# Altium PCB Arm_control_pull.PcbDoc
Units mil, origin at the board's own origin, x right, y up, seen from the top; angles counter-clockwise.
Board outline 14560 x 6790 mil, 2 copper layers (Top Layer, Bottom Layer), stack 61.8 mil thick; 46 components, 53 nets, 373 pads, 23 vias.
Unrouted connection lines stored in the file: 8.
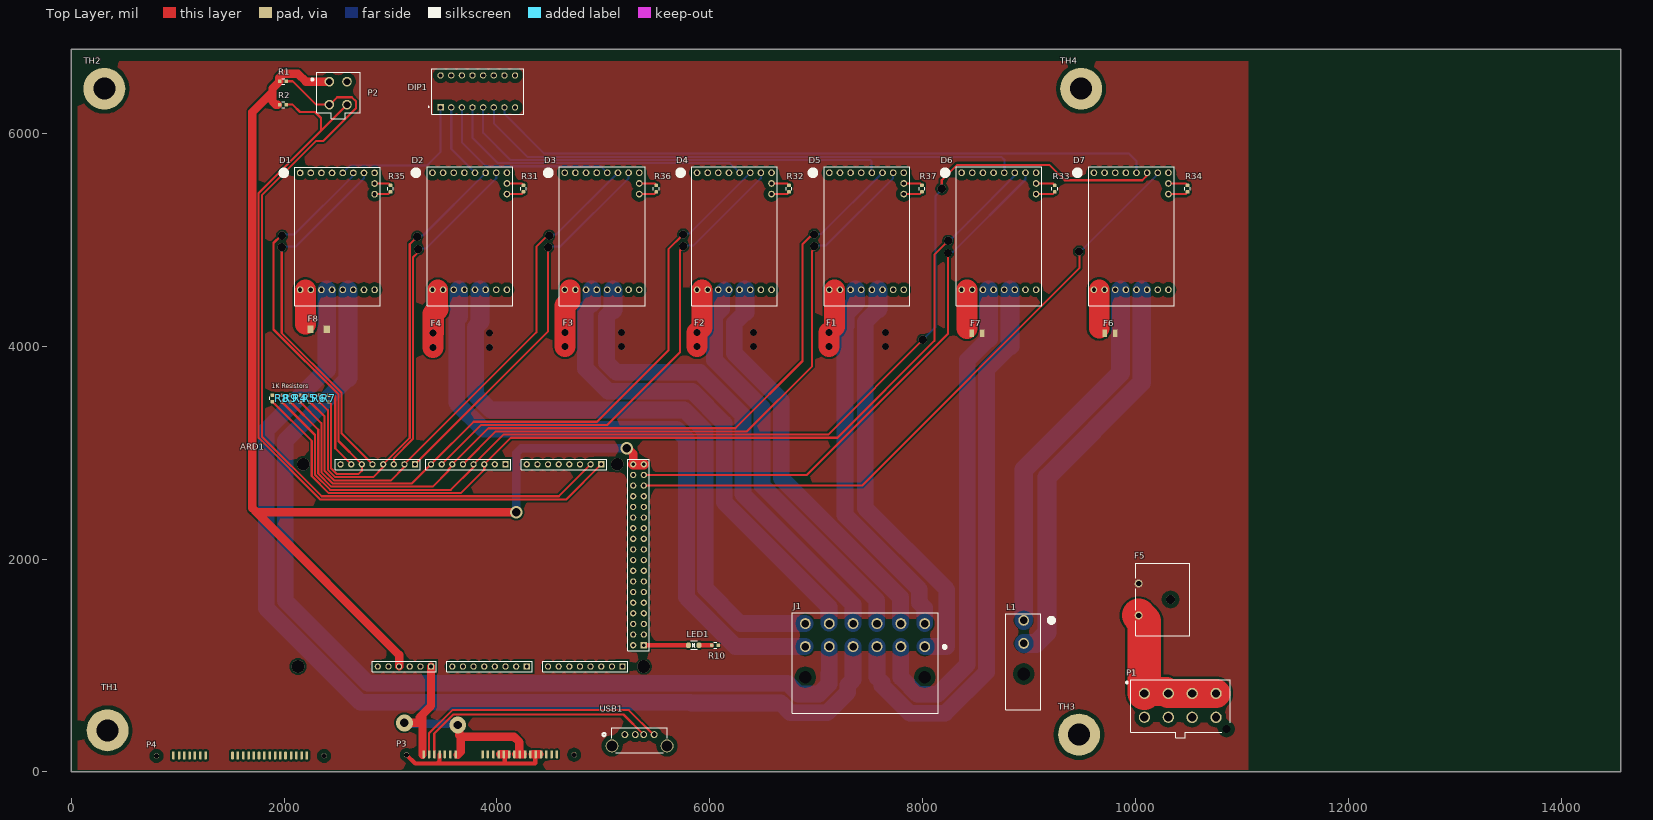
[diagram p0: Top Layer view]
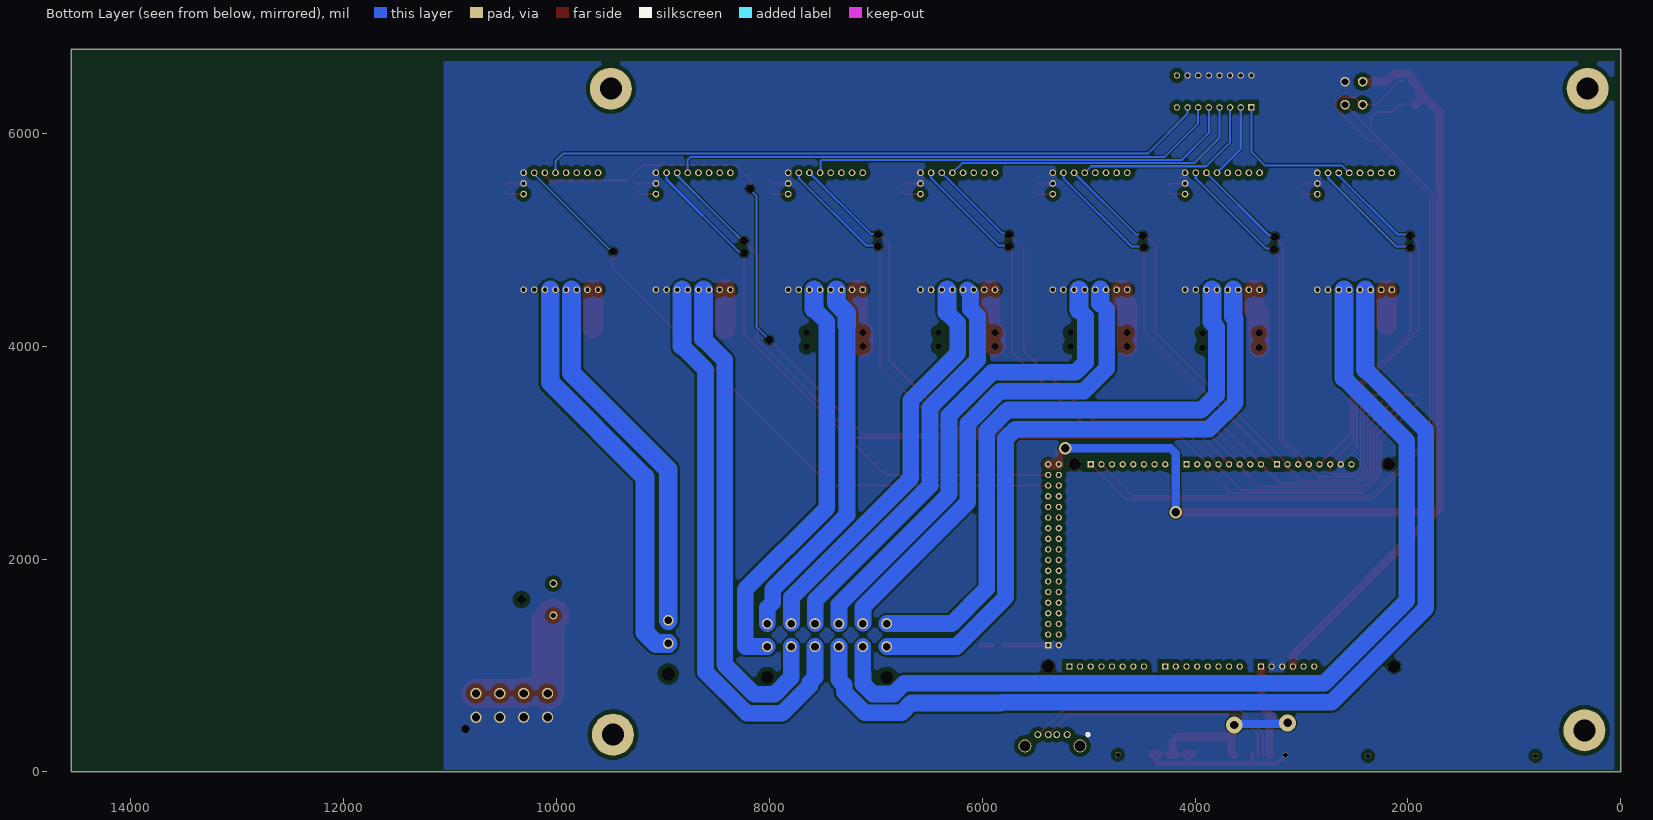
[diagram p1: Bottom Layer view, seen from below]

## Layer stack, top to bottom
Top Solder: solder mask 0.4, Solder Resist, Dk 3.5
Top Layer: signal copper 1.4
Dielectric 1: core 59, Core-043, Dk 4.3
Bottom Layer: signal copper 1.4
Bottom Solder: solder mask 0.4, Solder Resist, Dk 3.5

## Board outline
0,0 0,6790 14560,6790 14560,0

## Design rules (kind name [scope] priority, off if disabled: settings)
BoardOutlineClearance [All] p1: gap=10 ignorepadtopadclearanceinfootprint=FALSE except(0: Arc-SplitContinuation Track-SplitContinuation SMDPad-SplitContinuation THPad-SplitContinuation Via-SplitContinuation Fill-SplitContinuation Poly-SplitContinuation Region-SplitContinuation Text-SplitContinuation; 5: Track-OutlineEdge SMDPad-OutlineEdge THPad-OutlineEdge Via-OutlineEdge Fill-OutlineEdge Poly-OutlineEdge Region-OutlineEdge Text-OutlineEdge)
Clearance 14.8VP_CLearance [InNet('14.8V') or InNet('OutA1') or  InNet('OutA2') or InNet('OutA3') or InNet('OutA4') or InNet('OutA5') or InNet('OutA6') or InNet('OutA7') or InNet('OutB1') or  InNet('OutB2') or InNet('OutB3') or InNet('OutB4') or InNet('OutB5') or InNet('OutB6') or InNet('OutB7')] p1: gap=20 ignorepadtopadclearanceinfootprint=TRUE except(0: Arc-Hole Track-Hole SMDPad-Hole THPad-Hole Via-Hole Fill-Hole Poly-Hole Region-Hole Text-Hole; 40: THPad-Poly)
Clearance [All] p2: gap=10 ignorepadtopadclearanceinfootprint=FALSE except(0: Arc-Hole Track-Hole SMDPad-Hole THPad-Hole Via-Hole Fill-Hole Poly-Hole Region-Hole Text-Hole; 40: THPad-Poly)
HoleSize [All] p1: absolutevalues=TRUE maxlimit=1000 minlimit=1 maxpercent=80.000 minpercent=20.000
PolygonConnect Direct_Connect [InComponent('P1')] p1: connectstyle=Direct reliefconductorwidth=10 reliefentries=4 polygonreliefangle="90 Angle" airgapwidth=10
PolygonConnect Thick_Connect [InComponent('D1') or  InComponent('D2') or InComponent('D3') or InComponent('D4') or InComponent('D5') or InComponent('D6') or InComponent('D7') or InComponent('VR1')] p2: connectstyle=Relief reliefconductorwidth=25 reliefentries=4 polygonreliefangle="90 Angle" airgapwidth=19.68
PolygonConnect [All] p3: thpad.connectstyle=Relief thpad.reliefconductorwidth=10 thpad.reliefentries=4 thpad.polygonreliefangle="90 Angle" thpad.airgapwidth=10 smdpad.connectstyle=Relief smdpad.reliefconductorwidth=10 smdpad.reliefentries=4 smdpad.polygonreliefangle="90 Angle" smdpad.airgapwidth=10 via.connectstyle=Direct via.reliefconductorwidth=10 via.reliefentries=4 via.polygonreliefangle="90 Angle" via.airgapwidth=10
RoomDefinition ARD [InComponentClass('ARD')] p1: confinementstyle=ConfineIn formatcopy=TRUE lockcomponents=FALSE outline 11060,20 60,20 60,6680 11060,6680
RoomDefinition Arm_control_pull [InComponentClass('Arm_control_pull')] p2: confinementstyle=ConfineIn formatcopy=TRUE lockcomponents=FALSE outline 60,20 11060,20 11060,6680 60,6680
RoutingVias [All] p1: holewidth=78.74 width=157.48 viastyle="Through Hole" minholewidth=39.37 minwidth=78.74 maxholewidth=78.74 maxwidth=157.48
SilkToSolderMaskClearance [IsPad] p1: minsilkscreentomaskgap=1 clearancetoexposedcopper=TRUE
SolderMaskExpansion [All] p1: expansion=4 istentingtop=FALSE
Width [All] p1: maxlimit=393.7 minlimit=10 preferedwidth=118.11 minimp=50.000000 maximp=50.000000 favimp=50.000000
28 further rules are at their usual default settings.

## Classes and differential pairs
component class Arm_control_pull: D1 D2 D3 D4 D5 D6 D7 DIP1 F1 F2 F3 F4 F5 F6 F7 F8 J1 L1 LED1 M1 M2 M3 M4 M5 M6 M7 P1 R10 R31 R32 R33 R34 R35 R36 R37
component class ARD: "1K Resistors" ARD1 K? P2 P3 P4 R1 R2 R4 R5 R6 R7 R8 R9 TH1 TH2 TH3 TH4 USB1

## Components (designator, comment, footprint, x,y, rotation, side; value= is the part's Value field where it differs from the comment)
"1K Resistors" "Res1" RESC1608X06N_0603 1890,3510 r270 top value=1K (schematic designator R3)
ARD1 "Arduino Mega" "Arduino Mega" 3680,1990 r0 top
D1 "Pololu G2 High-Power Motor Driver 18v25" "POLOLU 18V25" 2150,5629.21 r0 top
D2 "Pololu G2 High-Power Motor Driver 18v25" "POLOLU 18V25" 3393.33,5630 r0 top
D3 "Pololu G2 High-Power Motor Driver 18v25" "POLOLU 18V25" 4636.67,5630 r0 top
D4 "Pololu G2 High-Power Motor Driver 18v25" "POLOLU 18V25" 5880,5630 r0 top
D5 "Pololu G2 High-Power Motor Driver 18v25" "POLOLU 18V25" 7123.33,5630 r0 top
D6 "Pololu G2 High-Power Motor Driver 18v25" "POLOLU 18V25" 8366.67,5630 r0 top
D7 "Pololu G2 High-Power Motor Driver 18v25" "POLOLU 18V25" 9610,5630 r0 top
DIP1 "DIP Switch" "DIP Switch" 3820,6400 r0 top
F1 "FUSEHOLDER" "FUSEHOLDER 3557-20" 7120,4130 r0 top
F2 "FUSEHOLDER" "FUSEHOLDER 3557-20" 5880,4130 r0 top
F3 "FUSEHOLDER" "FUSEHOLDER 3557-20" 4640,4130 r0 top
F4 "FUSEHOLDER" "FUSEHOLDER 3557-20" 3400,4123.86 r0 top
F5 "MINI BLADE FUSE HOLDER" "MINI FUSE HOLDER" 10330,1620 r90 top
F6 "7 A FUSE" "7 A FUSE  0407007.WR" 9711.57,4120 r0 top
F7 "7 A FUSE" "7 A FUSE  0407007.WR" 8560,4120 r180 top
F8 "3 A FUSE" "3A FUSE ERB-RG3R00V" 2246.46,4160 r0 top
J1 "172064-1012" 172064-1012 6897.95,1393.94 r0 top
L1 "0768250002" "MOLEX 0768250002" 8950,1423.94 r0 top
LED1 "Blue LED" LTST-C171TBKT 5898.43,1190 r180 top
P1 "Mini-Fit Jr 8 Pos RA" "MOLEX 172065-0208" 10470,570 r180 top
P2 "Mini-Fit Jr 4 Pos" "MOLEX 0039281043" 2424.65,6486.54 r0 top
P3 "SATA 1" "Amphenol 10101788-002CLF" 3937.4,121.42 r180 top
P4 "SATA 2" "Amphenol 10101788-002CLF" 1587.4,111.42 r180 top
R1 "Res1" RESC1608X06N_0603 1990,6490 r180 top value=4.7K
R2 "Res1" RESC1608X06N_0603 1990,6270 r180 top value=4.7K
R4 "Res1" RESC1608X06N_0603 2150,3510 r270 top value=1K
R5 "Res1" RESC1608X06N_0603 2240,3510 r270 top value=1K
R6 "Res1" RESC1608X06N_0603 2330,3510 r270 top value=1K
R7 "Res1" RESC1608X06N_0603 2420,3510 r270 top value=1K
R8 "Res1" RESC1608X06N_0603 1980,3509.49 r270 top value=1K
R9 "Res1" RESC1608X06N_0603 2060,3510 r270 top value=1K
R10 "Res1" RESC1608X06N_0603 6050,1190 r180 top value=2.7k
R31 "Res1" RESC1608X06N_0603 4248.33,5480.51 r270 top value=50K
R32 "Res1" RESC1608X06N_0603 6745,5480.51 r270 top value=50K
R33 "Res1" RESC1608X06N_0603 9241.67,5480.51 r270 top value=50K
R34 "Res1" RESC1608X06N_0603 10490,5480.51 r270 top value=50K
R35 "Res1" RESC1608X06N_0603 3000,5480.51 r270 top value=50K
R36 "Res1" RESC1608X06N_0603 5496.67,5480.51 r270 top value=50K
R37 "Res1" RESC1608X06N_0603 7993.33,5480.51 r270 top value=50K
TH1 "M5-Screw-Hole" M5_Screw_Hole 340,390 r0 top
TH2 "M5-Screw-Hole" M5_Screw_Hole 310,6420 r0 top
TH3 "M5-Screw-Hole" M5_Screw_Hole 9470,350 r0 top
TH4 "M5-Screw-Hole" M5_Screw_Hole 9490,6420 r0 top
USB1 "UE27AE54100" UE27AE54100_AMP 5201.57,350 r0 top

## Footprints (in the part's own frame and the unit in brackets; to place one, negate y for a bottom-side part, rotate by r counter-clockwise, add the part's x,y. Pads: shape width x height; smd on the part's side, far side on the other; paste and mask are expansions set on the pad)
"3A FUSE ERB-RG3R00V" [mm] "SMT 3A 32V FAST BLOW"
  rect 1.5x1.8 smd: 1(0,0) 2(3.9,0)
"7 A FUSE  0407007.WR" [mm] "SMT 8A 24V I2C TIME LAG"
  rect 1x1.8 smd: 1(0,0) 1(2.5,0)
172064-1012 [mm] "Connector Header Through Hole, Right Angle 12 position 0.224\" (5.70mm)"
  round 2.6 hole 1.8: 1(28.5,-5.5) 2(22.8,-5.5) 3(17.1,-5.5) 4(11.4,-5.5) 5(5.7,-5.5) 6(0,-5.5) 7(28.5,0) 8(22.8,0) 9(17.1,0) 10(11.4,0) 11(5.7,0) 12(0,0)
  round 2.6 hole 3 unplated: M1(0,-12.8) M1(28.5,-12.8)
  silkscreen extent -3.11,-21.39 33.53,2.54, body extent -3.11,-21.39 31.75,0.57, height 14.55
"Amphenol 10101788-002CLF" [mm] "MALE R/A SATA SMT"
  rrect50% 0.6x1.9 smd: 1(-15.875,-1.1) 2(-14.63,-1.1) 3(-13.385,-1.1) 4(-12.14,-1.1) 5(-10.795,-1.1) 6(-9.55,-1.1) 7(-8.305,-1.1) 8(-7.06,-1.1) 9(-5.715,-1.1) 10(-4.47,-1.1) 11(-3.225,-1.1) 12(-1.98,-1.1) 13(-0.735,-1.1) 14(0.61,-1.1) 15(1.855,-1.1) 16(8.28,-1.1) 17(9.525,-1.1) 18(10.87,-1.1) 19(12.115,-1.1) 20(13.36,-1.1) 21(14.605,-1.1) 22(15.95,-1.1)
  round 1.25 hole 1.2: 3(-20,-0.98) 4(20,-0.98)
  body extent -22.75,-2 22.75,8.5, height 3.3
"Arduino Mega" [mm] "Arduino Mega 2560"
  rect 1.5x1.5 hole 0.9: 0(10.16,22.86) 8(-11.43,22.86) 21(33.02,22.86) 59(-7.62,-25.4) 67(15.24,-25.4) 75(38.1,-25.4) 79(43.18,-20.32)
  round 1.5 hole 0.9: 1(7.62,22.86) 2(5.08,22.86) 3(2.54,22.86) 4(0,22.86) 5(-2.54,22.86) 6(-5.08,22.86) 7(-7.62,22.86) 9(-13.97,22.86) 10(-16.51,22.86) 11(-19.05,22.86) 12(-21.59,22.86) 13(-24.13,22.86) 14(15.24,22.86) 15(17.78,22.86) 16(20.32,22.86) 17(22.86,22.86) 18(25.4,22.86) 19(27.94,22.86) 20(30.48,22.86) 22(40.64,20.32) 23(43.18,20.32) 24(40.64,17.78) 25(43.18,17.78) 26(40.64,15.24) 27(43.18,15.24) 28(40.64,12.7) 29(43.18,12.7) 30(40.64,10.16) 31(43.18,10.16) 32(40.64,7.62) 33(43.18,7.62) 34(40.64,5.08) 35(43.18,5.08) 36(40.64,2.54) 37(43.18,2.54) 38(40.64,0) 39(43.18,0) 40(40.64,-2.54) 41(43.18,-2.54) 42(40.64,-5.08) 43(43.18,-5.08) 44(40.64,-7.62) 45(43.18,-7.62) 46(40.64,-10.16) 47(43.18,-10.16) 48(40.64,-12.7) 49(43.18,-12.7) 50(40.64,-15.24) 51(43.18,-15.24) 52(40.64,-17.78) 53(43.18,-17.78) 54(-20.32,-25.4) 55(-17.78,-25.4) 56(-15.24,-25.4) 57(-12.7,-25.4) 58(-10.16,-25.4) 60(-2.54,-25.4) 61(0,-25.4) 62(2.54,-25.4) 63(5.08,-25.4) 64(7.62,-25.4) 65(10.16,-25.4) 66(12.7,-25.4) 68(20.32,-25.4) 69(22.86,-25.4) 70(25.4,-25.4) 71(27.94,-25.4) 72(30.48,-25.4) 73(33.02,-25.4) 74(35.56,-25.4) 76(-26.67,22.86) 77(-29.21,22.86) 78(40.64,-20.32) 80(43.18,22.86) 81(40.64,22.86)
  silkscreen extent -30.48,-26.67 44.45,24.13
"DIP Switch" [mil] "8 position SPST DIP Switch"
  rect 59.37x59.37 hole 39.37: 1A(-350,-155)
  round 59.37 hole 39.37: 1B(-350,145) 2A(-250,-155) 2B(-250,145) 3A(-150,-155) 3B(-150,145) 4A(-50,-155) 4B(-50,145) 5A(50,-155) 5B(50,145) 6A(150,-155) 6B(150,145) 7A(250,-155) 7B(250,145) 8A(350,-155) 8B(350,145)
  silkscreen extent -467,-218 431,208
"FUSEHOLDER 3557-20" [mil] "THT FUSEHOLDER 10 A 32 V FAST BLOW"
  round 60 hole 64.96: 1(0,0) 2(530.32,0) 3(0,-133.86) 4(531.1,-133.86)
LTST-C171TBKT [mm]
  rrect50% 1.1x1.25 smd paste+0: 1(0,0) 2(2.5,0)
  silkscreen extent 0.46,-1.02 1.98,1.02
M5_Screw_Hole [mm]
  round 10 hole 5.25 mask+0.2: 1(0,0)
"MINI FUSE HOLDER" [mil] "POWER PLANE 20A MINI FUSE"
  round 75 hole 50: 1(-150,300) 2(150,300)
  round 82 hole 82 unplated: ""(0,0)
  silkscreen extent -340,-180 340,328
"MOLEX 172065-0208" [mm] "Connector Header Through Hole 8 position 0.224\" (5.70mm)"
  round 2.7 hole 2: 1(9.79,-4.236) 2(4.09,-4.236) 3(-1.61,-4.236) 4(-7.31,-4.236) 5(9.79,1.439) 6(4.09,1.439) 7(-1.61,1.464) 8(-7.31,1.464)
  round 0 hole 1.9: 6(-9.79,4.236)
  silkscreen extent -10.67,-7.56 14.1,6.35, body extent -10.5,-7.54 12.96,6.49, height 15.61
"MOLEX 0039281043" [mm] "Connector Header Through Hole 4 position 0.165\" (4.20mm)"
  round 2.3 hole 1.6: 1(0,0) 2(4.2,0) 3(0,-5.5) 4(4.2,-5.5)
  silkscreen extent -4.24,-8.89 7.37,2.29, body extent -3.07,-8.82 7.33,2.18, height 12.8
"MOLEX 0768250002" [mm]
  round 2.6 hole 1.8: 1(0,0) 2(0,-5.5)
  round 2.6 hole 3: ""(0,-12.8)
  silkscreen extent -4.32,-21.39 7.11,1.52, body extent -4.32,-21.39 4.03,0.57, height 14.05
"POLOLU 18V25" [mm]
  round 1.6 hole 1 paste+0: 1(17.78,0) 2(15.24,0) 3(12.7,0) 5(7.62,0) 6(5.08,0) 7(2.54,0) 10(17.78,-5.08) 11(15.24,-27.92) 11(17.78,-27.92) 12(12.7,-27.92) 13(5.08,-27.92) 13(7.62,-27.92) 14(2.54,-27.92)
  round 1.6 hole 1: 4(10.16,0) 8(0,0) 9(17.78,-2.54) 12(10.16,-27.92) 14(0,-27.92)
  silkscreen extent -4.12,-31.75 19.18,1.4, body extent -1.27,-31.72 19.05,1.3, height 9.57
RESC1608X06N_0603 [mm] "Chip Resistor, 2-Leads, Body 1.60x0.80mm, IPC Medium Density"
  rrect50% 0.85x0.9 smd: 1(-0.775,0) 2(0.775,0)
  silkscreen extent -0.38,-0.66 0.34,0.69, body extent -0.85,-0.45 0.85,0.45, height 0.55
UE27AE54100_AMP [mil]
  round 65 hole 45 mask+0: 1(0,0) 2(98.43,0) 3(177.17,0) 4(275.59,0)
  round 121 hole 101: 5(-120.87,-106.69) 6(396.46,-106.69)
  silkscreen extent -210,-171 401,64, body extent 0,0 10,10, height 10

## Part data
"1K Resistors" R1 R2 R4 R5 R6 R7 R8 R9 R10 R31 R32 R33 R34 R35 R36 R37: "Resistor", LatestRevisionDate=17-Jul-2002, LatestRevisionNote="Re-released for DXP Platform.", PackageDescription="Axial Device, Thru-Hole; 2 Leads; 0.3 in Pin Spacing", PackageReference=AXIAL-0.3, Published=8-Jun-2000, Publisher="Altium Limited"
F5: library part 01530007Z, "Fuse Holder 15A 32V 1 Circuit Blade Through Hole", Package=None, Availability=Unavailable, MP=01530007Z, Price=None
J1: "Conn Shrouded Header HDR 12 POS 5.7mm Solder RA Thru-Hole Tray", Color=Black, Manufacturer 1="Molex Waldom", Max Operating Temperature=120°C, Min Operating Temperature=-40°C, Supplier Part Number 1=WM11214-ND, Category=Connectors, ComponentLink1Description=http://www.molex.com/pdm_docs/ps/PS-76823-100.pdf?src-supplier=Digi-Key, ComponentLink1URL=http://www.molex.com/pdm_docs/ps/PS-76823-100.pdf?src-supplier=Digi-Key, ComponentLink2Description=http://www.molex.com/pdm_docs/sd/1720641004_sd.pdf?src-supplier=Avnet, ComponentLink2URL=http://www.molex.com/pdm_docs/sd/1720641004_sd.pdf?src-supplier=Avnet, Connector Type="Male Pin", Contact Plating=Gold, Fastening Type=Ramp, Glow Wire Compliant=Compliant, Halogen Free="Low Halogen", Manufacturer Part Number 1=172064-1012, Mount="Through Hole", Number of Circuits=12, Number of Contacts=12, Number of Positions=12, Number of Rows=2, Orientation="Right Angle", Packaging=Tray, Pitch=5.7mm, Pricing 1="1=16.34000, 10=14.85400, 100=12.62590, 500=10.76916, 1000=9.87791 (USD)", RoHS=Yes, Row Spacing=0.224inch, Stock 1=343, Supplier 1=Digi-Key, Termination=Solder
L1: "Conn Power HDR 2 POS 5.7mm Solder RA Thru-Hole 2 Terminal 1 Port", Color=Black, Manufacturer 1=Molex, Supplier Part Number 1=WM11969-ND, Category=Connectors, ComponentLink1Description=https://www.molex.com/pdm_docs/sd/768250002_sd.pdf?src-supplier=Digi-Key, ComponentLink1URL=https://www.molex.com/pdm_docs/sd/768250002_sd.pdf?src-supplier=Digi-Key, Connector Type="Male Pin", Contact Plating=Tin, Fastening Type=Ramp, Manufacturer Part Number 1=0768250002, Mount="Through Hole", Number of Positions=2, Number of Rows=2, Packaging=Tray, Pricing 1="1=1.13000, 10=0.99300, 25=0.93440, 50=0.89560, 100=0.85670, 250=0.77880, 500=0.70092, 2016=0.58410, 4032=0.56463 (USD)", RoHS=Yes, Row Spacing=0.224inch, Stock 1=2157, Supplier 1=Digi-Key, Termination=Solder
P1: library part "Molex Mega-Fit 8pos Vert"
P2: library part "Molex 0039281043", "Mini-Fit Jr. Header, Dual Row, Right-Angle, with Snap-in Plastic Peg PCB Lock, 6 Circuits, PA Polyamide Nylon 6/6 94V-2, 0.76µm Select Gold (Au) Plating"
P3: "SATA connector.  / Connector 1 for option 1 as per Spec", Supplier 1=Digi-Key
P4: "SATA connector.  / Connector 2 for option 1 as per Spec", Supplier 1=Digi-Key
USB1: "No Description Available", Mfr_Name="Amphenol ICC", Copyright="Copyright (C) 2022 Ultra Librarian. All rights reserved.", Digi-Key_Part_Number_1=UE27AE54100-ND, Digi-Key_Part_Number_2=UE27AE54100-NDL, Manufacturer_Part_Number=UE27AE54100, RefDes=RefDes, Type=DEV
D1 D2 D3 D4 D5 D6 D7: Category="Brushed DC motor"

## Via types
v1: diameter 78.74, hole 78.74, Top Layer to Bottom Layer, 15 vias
v2: diameter 118.11, hole 118.11, Top Layer to Bottom Layer, 4 vias
v3: diameter 157.48, hole 78.74, Top Layer to Bottom Layer, 2 vias
v4: diameter 118.11, hole 78.74, Top Layer to Bottom Layer, 2 vias

## Nets (pads, with @x,y where several pads share a name; then routed paths per layer and width w, separated by ;. In a path a pad name is that pad's centre, name@x,y a point inside that pad or via, vN(x,y) a via of type N, cw(c..) or ccw(c..) an arc to the next point about the centre after c; other vN are vias at no path point)
3V3: ARD1.55
5V: ARD1.56 ARD1.80 ARD1.81 P2.1 R1.2 R2.2 | length 11228.1
  Top Layer w19.68: ARD1.80 ARD1.80@5391.57,2901.57
  Top Layer w78.74: 1940,6270 1920,6270 1890,6300 1890,6390 ; P2.1 2203.46,6486.54 2130,6560 1991.14,6560 1954.41,6523.27 1954.41,6487.87 1890,6423.46 1890,6390 ; ARD1.56 3080,1100 1740,2440 ; v4(4180,2440) 1740,2440 ; v4(5220,3040) 5230.65,3040 5280,2990.65 ARD1.81 ; 1740,2440 1701.1,2478.9 1701.1,6201.1 1890,6390
  Top Layer w98.43: ARD1.81 ARD1.80
  Bottom Layer w78.74: v4(4180,2440) 4180,2993.88 4226.12,3040 v4(5220,3040)
14.8V: D1.14 D2.14 D3.14 D4.14 D5.14 D6.14 D7.14 F1.1 F1.2 F1.3 F1.4 F2.1 F2.2 F2.3 F2.4 F3.1 F3.2 F3.3 F3.4 F4.1 F4.2 F4.3 F4.4 F5.2 F6.1 F7.1 F8.1 F8.2 R10.1 | length 3934.2
  Top Layer w10: D2.14@3393.33,4530.79 3443.33,4530.79 D2.14@3493.33,4530.79 ; D3.14@4636.67,4530.79 4686.67,4530.79 D3.14@4736.67,4530.79
  Top Layer w19.68: D1.14@2150,4530 2200,4530 D1.14@2250,4530 ; F1.1 7173.33,4183.33 ; D5.14@7123.33,4530.79 7173.33,4530.79 D5.14@7223.33,4530.79 ; D6.14@8366.67,4530.79 8416.67,4530.79 D6.14@8466.67,4530.79 ; 8416.67,4164.91 F7.1@8461.57,4120 ; D7.14@9610,4530.79 9660,4530.79 D7.14@9710,4530.79
  Top Layer w195: 3443.33,4348.33 3443.33,4530.79 ; 4686.67,4426.67 4686.67,4530.79
  Top Layer w196.85: 2200,4206.46 2200,4530 ; F4.3 F4.1 ; F3.3 F3.1 ; F2.3 F2.1 5925,4175 5925,4530 ; F1.3 F1.1 ; 7173.33,4183.33 7173.33,4530.79 ; 8416.67,4164.91 8416.75,4164.99 8416.75,4530.71 8416.67,4530.79 ; 9660,4171.57 9660,4530.79
  Top Layer w200: F4.1 3400,4305 3443.33,4348.33 ; F3.1 4640,4380 4686.67,4426.67
ARD_VIN: ARD1.59 P3.7 P3.8 P3.9 P3.16 P3.22 | length 2601.4
  Top Layer w78.74: v3(3130,460) 3271.26,460 ; 3271.26,511.26 3300,540 ; P3.22@3300,159.48 3300,540 ; ARD1.59 3380,620 3300,540 ; 3630,160 3660,190 3660,330 ; v3(3630.31,440.9) 3645.38,425.83 3645.38,344.62 3660,330 ; 4180,164.72 P3.8 4241.34,164.72 ; P3.8@4210,170.08 4210,280 4160,330 3660,330
  Bottom Layer w78.74: v3(3130,460) 3139.55,450.45 3620.76,450.45 v3(3630.31,440.9)
DIP1: D1.4 DIP1.1A | length 1420.4
  Bottom Layer w19.68: D1.4 2620.79,5700 3343.88,5700 3470,5826.12 DIP1.1A
DIP2: D2.4 DIP1.2A | length 707.5
  Bottom Layer w19.68: DIP1.2A 3570,5853.33 D2.4
DIP3: D3.4 DIP1.3A | length 1814.1
  Bottom Layer w19.68: DIP1.3A 3670,5916.12 3894.86,5691.26 4975.41,5691.26 D3.4
DIP4: D4.4 DIP1.4A | length 2931.7
  Bottom Layer w19.68: DIP1.4A 3770,5960 4009.06,5720.94 6189.06,5720.94 D4.4
DIP5: D5.4 DIP1.5A | length 4110
  Bottom Layer w19.68: DIP1.5A 3870,6006.12 4125.49,5750.63 7508.47,5750.63 7520,5739.1 7520,5633.33 D5.4
DIP6: D6.4 DIP1.6A | length 5213.6
  Bottom Layer w19.68: DIP1.6A 3970,6096.12 4285.81,5780.31 8739.68,5780.31 8770,5750 8770,5633.33 D6.4
DIP7: D7.4 DIP1.7A | length 6294.4
  Bottom Layer w19.68: DIP1.7A 4070,6184.87 4444.87,5810 9940,5810 10010,5740 D7.4
GND: "1K Resistors.1" ARD1.57 ARD1.58 ARD1.76 ARD1.78 ARD1.79 D1.1 D1.9 D1.11 D2.1 D2.9 D2.11 D3.1 D3.9 D3.11 D4.1 D4.9 D4.11 D5.1 D5.9 D5.11 D6.1 D6.9 D6.11 D7.1 D7.9 D7.11 DIP1.1B DIP1.2B DIP1.3B DIP1.4B DIP1.5B DIP1.6B DIP1.7B LED1.2 P1.5 P1.6 P1.7 P1.8 P2.2 P3.4 P3.5 P3.6 P3.10 P3.11 P3.12 P3.19 R4.1 R5.1 R6.1 R7.1 R8.1 R9.1 R31.1 R32.1 R33.1 R34.1 R35.1 R36.1 R37.1 | length 4509.7
  Top Layer w19.68: 1890,3543.46 2150,3543.46 2330,3543.46 2466.54,3543.46 2480.32,3529.68 2480.32,3039.68 ARD1.76 ; D1.9 2980.83,5529.21 2992.13,5517.91 R35.1@3000,5517.91 ; D2.9 4230,5530 4241.26,5518.74 R31.1@4248.33,5518.74 ; D3.9 5480.64,5530 R36.1@5496.67,5513.98 ; D4.9 6728.98,5530 R32.1@6745,5513.98 ; D5.9 7977.31,5530 R37.1@7993.33,5513.98 ; D6.9 9225.64,5530 R33.1@9241.67,5513.98 ; D7.9 10471.02,5530 10484.92,5516.1 R34.1@10490,5516.1
  Top Layer w39.37: P3.4@3150,160 3232.05,77.95 3437.95,77.95 ; P3.19 3460.43,100.43 3437.95,77.95 ; P3.11@4072.24,156.85 4072.24,127.8 4073.28,126.77 4073.28,93.38 ; P3.5@4360,147.01 4360,82.07 4355.88,77.95 3437.95,77.95 ; ARD1.79 LED1.2
  Top Layer w78.74: 4030,164.72 P3.11 4090,164.72 ; 4335.28,164.72 P3.5 4400,164.72
NetARD1_2: "1K Resistors.2" ARD1.2 D6.3 | length 9291.8
  Top Layer w19.68: 1890,3479.49 2258.9,3110.59 2258.9,2781.1 2420,2620 3660.99,2620 3880,2839.01 ARD1.2 4130,3140 7200,3140 8110,4050 8110,4860 v1(8240,4990)
  Bottom Layer w19.68: v1(8240,4990) 8252.16,4990 8428.63,5166.47 8866.67,5604.5 D6.3
NetARD1_3: ARD1.3 D7.3 R8.2 | length 10847
  Top Layer w19.68: R8.2@1980,3476.02 2290,3166.02 2290,2791.98 2431.98,2650 3565.5,2650 3780,2864.5 ARD1.3 4059.69,3169.68 7111.44,3169.68 v1(8001.57,4059.82) ; v1(8180,5480) 8180,5560 8321.5,5701.5 9194,5701.5 9335.5,5560 10065.5,5560 10101.71,5596.22 10101.71,5621.71 D7.3
  Bottom Layer w19.68: v1(8001.57,4059.82) 8120,4178.24 8120,5409.35 8180,5469.35 v1(8180,5480)
NetARD1_4: ARD1.4 D5.2 | length 5858.4
  Top Layer w19.68: ARD1.4 3989.37,3199.37 6349.37,3199.37 6962.2,3812.2 6962.2,4894.37 6972.47,4904.63 6972.47,4932.47 v1(6980,4940)
  Bottom Layer w19.68: v1(6980,4940) 6987.53,4947.53 7091.86,4947.53 7723.33,5579.01 D5.2
NetARD1_5: ARD1.5 D5.3 R9.2 | length 8013.8
  Top Layer w19.68: R9.2@2060,3476.54 2320,3216.54 2320,2803.96 2443.96,2680 3395.5,2680 3544.03,2828.53 3544.03,2843.38 3585.33,2884.67 3585.33,2895.33 3919.06,3229.05 6239.06,3229.05 6871.57,3861.57 6871.57,4957.56 6964.02,5050 v1(6980,5050)
  Bottom Layer w19.68: v1(6980,5050) 6985.56,5055.56 7048.9,5055.56 D5.3
NetARD1_6: ARD1.6 D4.2 | length 4730.4
  Top Layer w19.68: ARD1.6 3848.74,3258.74 5034.24,3258.74 5720,3944.5 5720,4899.35 5750,4929.35 v1(5750,4940)
  Bottom Layer w19.68: v1(5750,4940) 5757.53,4947.53 5848.53,4947.53 6480,5579.01 D4.2
NetARD1_7: ARD1.7 D4.3 R4.2 | length 6583.3
  Top Layer w19.68: R4.2@2150,3476.54 2350,3276.54 2350,2815.94 2455.94,2710 3200,2710 ARD1.7 3780,3290 4940,3290 5610,3960 5610,4910 v1(5750,5050)
  Bottom Layer w19.68: v1(5750,5050) 5761.3,5061.3 5811.3,5061.3 D4.3
NetARD1_8: ARD1.8 D3.2 | length 3634.3
  Top Layer w19.68: ARD1.8 4480,4140 v1(4480,4930)
  Bottom Layer w19.68: v1(4480,4930) 4487.53,4937.53 4595.19,4937.53 5236.67,5579.01 D3.2
NetARD1_9: ARD1.9 D3.3 R5.2 | length 5187.4
  Top Layer w19.68: R5.2 2240.98,3479.49 2247.87,3472.6 2247.87,3471.61 2380,3339.49 2380,2827.92 2467.92,2740 3005.5,2740 3130,2864.5 ARD1.9 4370,4130 4370,4935.98 4474.02,5040 v1(4490,5040)
  Bottom Layer w19.68: v1(4490,5040) 4501.3,5051.3 4557.97,5051.3 D3.3
NetARD1_10: ARD1.10 D2.2 | length 3177.4
  Top Layer w19.68: ARD1.10 3031.04,2891.04 3031.04,2949.06 3209.69,3127.7 3209.69,4834.15 3258.9,4883.37 v1(3258.9,4910)
  Bottom Layer w19.68: v1(3258.9,4910) 3266.43,4917.53 3331.86,4917.53 3993.33,5579.01 D2.2
NetARD1_11: ARD1.11 D2.3 R6.2 | length 4450.7
  Top Layer w19.68: R6.2 2410,3399.49 2410,2839.9 2479.9,2770 2835.5,2770 2930,2864.5 ARD1.11 3180,3140 3180,4960 v1(3250,5030)
  Bottom Layer w19.68: v1(3250,5030) 3261.3,5041.3 3304.63,5041.3 D2.3
NetARD1_12: ARD1.12 D1.2 | length 3485.2
  Top Layer w19.68: v1(1977.45,4929.94) 1977.45,4122.55 2540,3560 2540,3180 ARD1.12
  Bottom Layer w19.68: v1(1977.45,4929.94) 1984.98,4937.48 2109.26,4937.48 2750,5578.22 D1.2
NetARD1_13: ARD1.13 D1.3 R7.2 | length 4482.2
  Top Layer w19.68: v1(1980,5040) 1970,5040 1900,4970 1900,4157.8 2510,3547.8 2510,3110 ARD1.13 2730,2830 2700,2800 2491.89,2800 2440,2851.89 2440,3459.49 2427.87,3471.61 2427.87,3472.6 2420.98,3479.49 R7.2
  Bottom Layer w19.68: v1(1980,5040) 1990,5050 2096.29,5050 2650,5603.72 D1.3
NetARD1_23: ARD1.23 D6.2 | length 5244.4
  Top Layer w19.68: ARD1.23 6910,2790 8238.43,4118.43 v1(8238.43,4876.8)
  Bottom Layer w19.68: v1(8238.43,4876.8) 8245.96,4884.33 8284.33,4884.33 8966.67,5566.67 D6.2
NetARD1_25: ARD1.25 D7.2 | length 6152.8
  Top Layer w19.68: ARD1.25 7430,2690 9473.43,4733.43 9473.43,4886.57 v1(9470,4890)
  Bottom Layer w19.68: v1(9470,4890) 9477.53,4897.53 9491.9,4897.53 10210,5615.64 D7.2
NetD1_10: D1.10 R35.2 | length 158.6
  Top Layer w19.68: D1.10 2979.21,5429.21 R35.2
NetD2_10: D2.10 R31.2 | length 162.1
  Top Layer w19.68: D2.10 4231.29,5430 R31.2@4248.33,5447.05
NetD3_10: D3.10 R36.2 | length 168.3
  Top Layer w19.68: D3.10 5476.67,5430 R36.2
NetD4_10: D4.10 R32.2 | length 172.1
  Top Layer w19.68: D4.10 6727.95,5430 R32.2@6745,5447.05
NetD5_10: D5.10 R37.2 | length 178.3
  Top Layer w19.68: D5.10 7973.33,5430 R37.2
NetD6_10: D6.10 R33.2 | length 182.1
  Top Layer w19.68: D6.10 9224.62,5430 R33.2@9241.67,5447.05
NetD7_10: D7.10 R34.2 | length 187.1
  Top Layer w19.68: D7.10 10472.95,5430 R34.2@10490,5447.05
NetF5_1: F5.1 P1.1 P1.2 P1.3 P1.4 | length 1393.5
  Top Layer w275.59: P1.1@10102.36,754.57 P1.2@10291.18,754.57 ; P1.2 P1.3 P1.4
  Top Layer w314.96: F5.1 10084.57,1415.43 P1.1
NetLED1_1: LED1.1 R10.2 | length 121.1
  Top Layer w39.37: LED1.1 R10.2
NetP3_20: P3.20 USB1.3 | length 2341.6
  Top Layer w19.68: P3.20@3410,140 3410,360 3589.48,539.48 5189.26,539.48 USB1.3
NetP3_21: P3.21 USB1.4 | length 2521.5
  Top Layer w19.68: P3.21@3360,140 3360,360 3580,580 5240,580 USB1.4@5473.58,346.42
OutA1: D1.12 J1.5 | length 9030.1
  Bottom Layer w19.68: 7120,900 7120,927.45
  Bottom Layer w157.48: 2600,3700 2010,3110 2010,1610 2787.8,832.2 6732.59,832.2 6832.59,732.2 7027.75,732.2 7120,824.45 7120,900 ; 7120.03,927.48 7122.36,929.81 J1.5
  Bottom Layer w177.17: 2600,3700 2600,4530
OutA2: D2.12 J1.12 | length 5860.6
  Bottom Layer w157.48: 3833.48,4226.52 3833.48,4213.48 3799.09,4179.09 3799.09,3541.9 3940.99,3400 5760,3400 5957.48,3202.52 5957.48,1722.52 6286.06,1393.94 J1.12
  Bottom Layer w177.17: 3833.48,4226.52 3840,4233.04 3840,4530
OutA3: D3.12 J1.10 | length 4580.3
  Bottom Layer w157.48: 5090,4339.48 5030,4279.48 5030,3847.21 5122.25,3754.96 5907.03,3754.96 6312.44,3349.55 6312.44,2608.55 7346.77,1574.22 J1.10
  Bottom Layer w177.17: 5090,4339.48 5090,4530
OutA4: D4.12 J1.8 | length 3826
  Bottom Layer w19.68: J1.8@7791.07,1398.46 J1.8
  Bottom Layer w157.48: 6330,4320 6330,4319.01 6230,4219.01 6230,3933.98 6670.46,3493.52 6670.46,2760.46 7791.07,1639.85 J1.8@7791.07,1398.46
  Bottom Layer w177.17: 6330,4320 6330,4530
OutA5: D5.12 J1.1 | length 3927.6
  Bottom Layer w157.48: 7580,4350 7460,4230 7460,2480 8227.4,1712.6 8227.4,1177.4 J1.1
  Bottom Layer w177.17: 7580,4350 7580,4530
OutA6: D6.12 J1.3 | length 5318
  Bottom Layer w19.68: 7570,890 7571.18,891.18
  Bottom Layer w157.48: 7570,890 7618.11,841.89 7618.11,812.08 7878.42,551.76 8212.76,551.76 8600,939.01 8600,3780 8820,4000 ; 7571.18,891.18 J1.3
  Bottom Layer w177.17: 8820,4000 8820,4530
OutA7: D7.12 L1.2 | length 3850.5
  Bottom Layer w177.17: L1.2 9066.22,1207.4 9170,1311.18 9170,2770 10060,3660 10060,4530
OutB1: D1.13 J1.4 | length 9628.3
  Bottom Layer w157.48: 2400,3780.99 1832.52,3213.51 1832.52,1536.49 2714.28,654.72 5820.34,654.72 5828.17,646.9 6666.9,646.9 6759.08,554.72 7101.26,554.72 7297.48,750.94 7297.48,815.38 7346.77,864.67 J1.4
  Bottom Layer w177.17: 2400,3780.99 2400,4530
OutB2: D2.13 J1.6 | length 6166
  Bottom Layer w157.48: 3640,4280 3621.61,4261.61 3621.61,3468.39 3870,3220 5687.75,3220 5780,3127.75 5780,1640 6242.6,1177.4 J1.6
  Bottom Layer w177.17: 3640,4280 3640,4530
OutB3: D3.13 J1.11 | length 4573.8
  Bottom Layer w19.68: J1.11@7120,1396.3 J1.11
  Bottom Layer w157.48: 4890,4404.39 4830,4344.39 4830,3790 5042.52,3577.48 5833.51,3577.48 6134.96,3276.03 6134.96,2535.04 7120,1550 J1.11@7120,1396.3
  Bottom Layer w177.17: 4890,4404.39 4890,4530
OutB4: D4.13 J1.9 | length 3809.3
  Bottom Layer w19.68: J1.9@7570,1395.12 J1.9
  Bottom Layer w157.48: 6140,4530 6110.24,4500.24 6110.24,4350.24 6042.98,4282.98 6042.98,3870.01 6489.92,3423.06 6489.92,2690 7570,1609.92 J1.9@7570,1395.12
OutB5: D5.13 J1.7 | length 3488.1
  Bottom Layer w157.48: 7272.68,4190 7270,4187.32 7270,2411.91 7968.55,1713.36 7968.55,1591.45 8020,1540 J1.7
  Bottom Layer w177.17: 7272.68,4190 7272.68,4311.34 7370,4408.66 7370,4530
OutB6: D6.13 J1.2 | length 4700.1
  Bottom Layer w157.48: J1.2 7795.59,885.59 7951.94,729.24 8139.24,729.24 8420,1010 8420,3870 8620,4070
  Bottom Layer w177.17: 8620,4070 8620,4530
OutB7: D7.13 L1.1 | length 3483
  Bottom Layer w177.17: L1.1 8950,2840 9860,3750 9860,4530
SCL: ARD1.21 P2.4 R2.1 | length 7577.8
  Top Layer w19.68: R2.1@2028.74,6270 2080,6270 2148.4,6201.6 2289.18,6201.6 2345.53,6145.25 2345.53,6025.53 ; P2.4@2570.82,6270 P2.4 2345.53,6025.53 ; ARD1.21 4650,2560 2340,2560 1760.32,3139.69 1760.32,5440.31 2345.53,6025.53
SDA: ARD1.20 P2.3 R1.1 | length 7775.1
  Top Layer w19.68: 2040,6490 2080,6490 2300,6270 2427.84,6270 2497.84,6340 2635.96,6340 2675.28,6300.69 2675.28,6235.28 2370,5930 2300,5930 1790,5420 1790,3151.98 2351.98,2590 4580,2590 ARD1.20
pads on no net: ARD1.0 ARD1.1 ARD1.14 ARD1.15 ARD1.16 ARD1.17 ARD1.18 ARD1.19 ARD1.22 ARD1.24 ARD1.26 ARD1.27 ARD1.28 ARD1.29 ARD1.30 ARD1.31 ARD1.32 ARD1.33 ARD1.34 ARD1.35 ARD1.36 ARD1.37 ARD1.38 ARD1.39 ARD1.40 ARD1.41 ARD1.42 ARD1.43 ARD1.44 ARD1.45 ARD1.46 ARD1.47 ARD1.48 ARD1.49 ARD1.50 ARD1.51 ARD1.52 ARD1.53 ARD1.54 ARD1.60 ARD1.61 ARD1.62 ARD1.63 ARD1.64 ARD1.65 ARD1.66 ARD1.67 ARD1.68 ARD1.69 ARD1.70 ARD1.71 ARD1.72 ARD1.73 ARD1.74 ARD1.75 ARD1.77 D1.5 D1.6 D1.7 D1.8 D2.5 D2.6 D2.7 D2.8 D3.5 D3.6 D3.7 D3.8 D4.5 D4.6 D4.7 D4.8 D5.5 D5.6 D5.7 D5.8 D6.5 D6.6 D6.7 D6.8 D7.5 D7.6 D7.7 D7.8 DIP1.8A DIP1.8B F5. J1.M1 L1. P3.1 P3.2 P3.3 P3.13 P3.14 P3.15 P3.17 P3.18 P4.1 P4.2 P4.3 P4.4 P4.5 P4.6 P4.7 P4.8 P4.9 P4.10 P4.11 P4.12 P4.13 P4.14 P4.15 P4.16 P4.17 P4.18 P4.19 P4.20 P4.21 P4.22 TH1.1 TH2.1 TH3.1 TH4.1 USB1.1 USB1.2 USB1.5 USB1.6
copper on no net:
  other v2: 2130,990 5380,990 2180,2890 5130,2890

## Polygon pours and split planes (outlines as drawn)
GND on Bottom Layer "GND_L02_P001" (solid, pour order 1): 60,6680 11060,6680 11060,20 60,20
14.8V on Top Layer "14.8V_L01_P000" (solid, pour order 0): 60,6680 11060,6680 11060,20 60,20